# Altium PCB PCB1.PcbDoc (part 2 of 2)
Units mm, origin at the board's own origin, x right, y up, seen from the top; angles counter-clockwise.
Board outline 173.55 x 37.01 mm, 2 copper layers (Top Layer, Bottom Layer); 69 components, 61 nets, 220 pads, 230 vias.
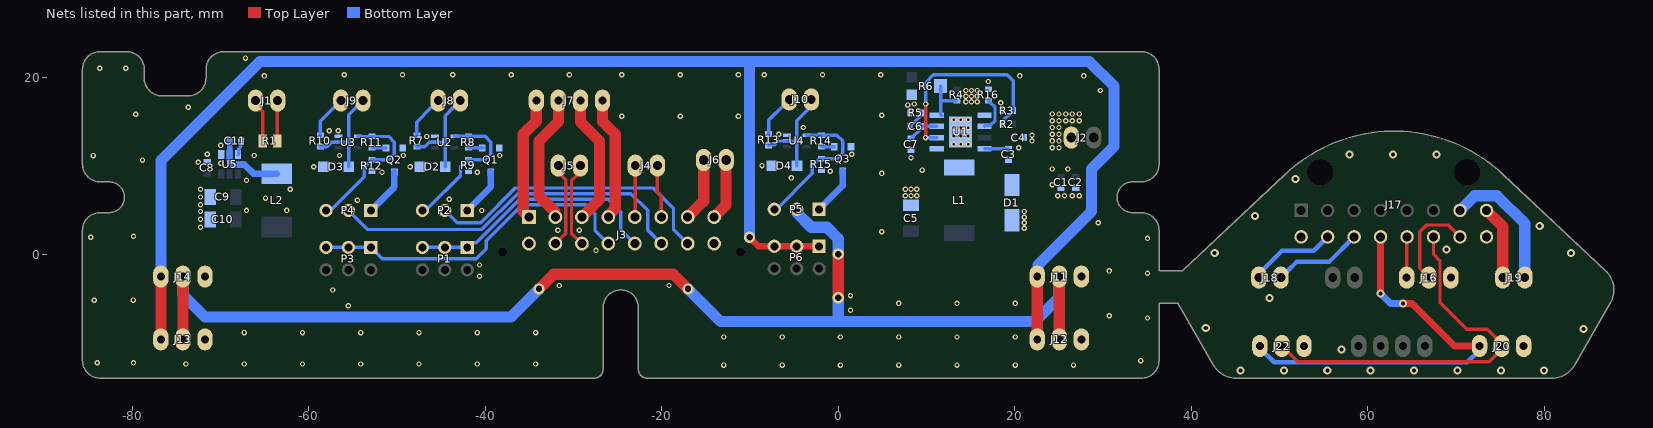
[diagram p2: the nets of this part, all layers, seen from the top]

## Via types
v1: diameter 0.61, hole 0.305, Top Layer to Bottom Layer, tented both sides, 188 vias
v2: diameter 0.914, hole 0.457, Top Layer to Bottom Layer, tented both sides, 23 vias
v3: diameter 0.305, hole 0.305, Top Layer to Bottom Layer, tented both sides, 10 vias
v4: diameter 1.27, hole 0.711, Top Layer to Bottom Layer, tented both sides, 9 vias

## Nets (pads, with @x,y where several pads share a name; then routed paths per layer and width w, separated by ;. In a path a pad name is that pad's centre, name@x,y a point inside that pad or via, vN(x,y) a via of type N, cw(c..) or ccw(c..) an arc to the next point about the centre after c; other vN are vias at no path point) (continued)
#GND: J16.3 J17.9 J17.16 J20.3 J22.3
  other v2: 45.593,-13.208 50.51,-13.208 55.426,-13.208 60.343,-13.208 65.26,-13.208 70.177,-13.208 75.093,-13.208 80.01,-13.208 57.023,-10.795 84.455,-8.509 41.656,-8.382 48.895,-4.953 42.672,0.127 83.058,0.127 68.961,0.508 79.502,3.175 47.244,4.318 51.816,8.509 57.948,11.303 62.865,11.303 67.782,11.303
"#Heater +": J17.7 J19.2 | length 15.5
  Bottom Layer w1.27: J17.7@70.468,4.953 72.119,6.604 74.676,6.604 77.811,3.469 J19.2@77.811,-2.667
"#Heater -": J17.8 J19.1 | length 8.3
  Top Layer w1.27: J17.8@73.516,4.905 75.311,3.11 J19.1@75.311,-2.667
"#signal_select B": J17.14 J20.2 J22.2 | length 43.5
  Top Layer w0.381: J22.2@50.292,-10.414 50.292,-10.419 51.117,-11.243 51.121,-11.243 52.07,-12.192 73.787,-12.192 75.184,-10.795 75.184,-10.16 73.533,-8.509 71.247,-8.509 68.199,-5.461 68.199,-0.762 67.468,-0.031 J17.14@67.468,1.953
"#signal_select C": J16.2 J17.15 | length 11.1
  Top Layer w0.381: J16.2@66.929,-2.667 66.929,-2.594 65.913,-1.578 65.913,2.54 66.675,3.302 69.119,3.302 J17.15@70.468,1.953
"#Thermistor A": J17.10 J18.1 | length 10
  Bottom Layer w0.508: J18.1@47.665,-2.667 47.665,-2.246 50.292,0.381 53.896,0.381 J17.10@55.468,1.953
"#Thermistor B": J17.11 J18.2 | length 10.2
  Bottom Layer w0.508: J18.2@50.165,-2.667 50.165,-2.662 50.99,-1.838 50.994,-1.838 51.943,-0.889 55.626,-0.889 J17.11@58.468,1.953
#VCC_select_B: J17.12 J20.1 J22.1 | length 46.9
  Top Layer w0.762: v2(61.468,-4.445) J17.12@61.468,1.953 ; v2(64.008,-5.588) 65.024,-5.588 69.85,-10.414 J20.1@72.684,-10.414
  Bottom Layer w0.508: J22.1@47.792,-10.414 47.792,-10.657 49.403,-12.268 71.304,-12.268 72.684,-10.888 J20.1@72.684,-10.414
  Bottom Layer w0.762: v2(61.468,-4.445) 62.611,-5.588 v2(64.008,-5.588)
#VCC_select_C: J16.1 J17.13 | length 4.6
  Top Layer w0.381: J16.1@64.429,-2.667 64.429,1.914 J17.13@64.468,1.953
A1: J3.1 J7.1 | length 14.1
  Top Layer w1.27: J3.1@-35.049,4.194 -35.687,4.832 -35.687,13.589 -34.21,15.066 J7.1@-34.21,17.399
A2: J3.2 J7.2 | length 14.9
  Top Layer w1.27: J3.2@-32.049,4.194 -32.106,4.251 -32.106,4.801 -33.909,6.604 -33.909,12.827 -31.71,15.026 J7.2@-31.71,17.399
B1: J3.3 J7.3 | length 14.9
  Top Layer w1.27: J7.3@-29.21,17.399 -29.21,14.986 -27.051,12.827 -27.051,6.192 J3.3@-29.049,4.194
B2: J3.4 J7.4 | length 14.1
  Top Layer w1.27: J7.4@-26.71,17.399 -26.71,15.026 -25.273,13.589 -25.273,5.139 -25.899,4.513 -25.899,4.425 -26.049,4.275 J3.4@-26.049,4.194
Endstop_X_A: J3.5 J4.1 | length 5.9
  Top Layer w0.381: J3.5@-23.049,4.194 -22.987,4.256 J4.1@-22.987,10.033
Endstop_X_B: J3.6 J4.2 | length 6
  Top Layer w0.381: J4.2@-20.487,10.033 -20.487,7.025 -20.049,6.587 J3.6@-20.049,4.194
GND: C1.1 C2.1 C4.1 C5.1 C7.1 C8.1 C9.1 C10.1 D1.2 D2.1 D3.1 D4.1 J2.2 J3.9 J3.16 J11.3 J12.3 J13.3 J14.3 Q1.2 Q2.2 Q3.2 R3.2 R5.2 R6.1 R9.1 R12.1 R15.1 R16.2 U1.5 U1.9 U2.3 U3.3 U4.3 U5.4
  other v1: -12.954,-12.573 -6.35,-12.573 0.254,-12.573 6.858,-12.573 13.462,-12.573 20.066,-12.573 26.67,-12.573 -73.914,-12.446 -67.31,-12.446 -60.706,-12.446 -54.102,-12.446 -47.498,-12.446 -40.894,-12.446 -34.29,-12.446 -83.947,-12.319 -79.857,-12.328 34.29,-12.065 -12.954,-9.398 -6.35,-9.398 0.254,-9.398 6.858,-9.398 13.462,-9.398 20.066,-9.398 -67.31,-8.89 -60.706,-8.89 -54.102,-8.89 -47.498,-8.89 -40.894,-8.89 -34.29,-8.89 35.052,-7.239 30.734,-6.985 1.397,-6.35 -55.499,-5.842 6.858,-5.588 13.462,-5.588 20.066,-5.588 -84.302,-5.216 -79.883,-5.207 1.397,-4.699 -57.277,-4.064 -31.623,-3.556 -19.177,-3.556 -40.648,-2.501 35.052,-2.159 30.734,-1.905 -40.648,-1.231 -27.44,0.42 35.052,1.778 -84.683,1.896 -79.857,2.023 4.953,2.54 -31.758,2.706 -29.345,2.706 21.082,2.921 -72.263,3.048 21.082,3.556 29.464,3.556 -72.263,3.937 21.082,4.191 -72.263,4.826 21.082,4.826 -67.056,4.953 -62.484,4.953 -40.385,4.948 -72.263,5.588 -54.482,6.091 -44.068,6.218 -64.897,6.35 -72.263,6.477 7.62,6.604 8.255,6.604 8.89,6.604 24.892,6.604 25.654,6.604 26.543,6.604 27.305,6.604 -72.263,7.366 -62.103,7.366 7.62,7.366 8.255,7.366 8.89,7.366 24.257,7.874 -67.056,8.382 -5.334,8.636 4.953,9.144 -51.689,9.271 -40.894,9.271 -0.889,9.398 9.525,9.525 24.257,9.652 26.035,9.652 -59.436,9.906 -48.514,9.906 -8.636,10.033 -69.977,10.287 -72.517,10.414 -78.841,10.659 8.255,10.922 -84.429,11.167 -66.166,11.171 -56.515,11.176 -49.276,11.176 -38.354,11.176 -71.501,11.303 1.524,11.303 20.447,12.065 24.257,12.065 25.019,12.065 -69.977,12.319 13.081,12.446 13.906,12.446 14.732,12.446 21.971,12.827 24.257,12.827 25.019,12.827 -46.609,13.335 13.081,13.377 13.906,13.377 14.732,13.377 21.971,13.462 -6.731,13.589 24.257,13.589 25.019,13.589 -57.658,13.97 -56.642,13.97 13.081,14.309 13.906,14.309 14.732,14.309 -3.937,14.351 24.257,14.351 25.019,14.351 24.257,15.113 25.019,15.113 25.781,15.113 26.543,15.113 27.305,15.113 13.081,15.24 13.906,15.24 14.732,15.24 -24.511,15.621 -17.907,15.621 -11.303,15.621 4.953,15.748 -79.603,15.866 24.257,15.875 25.019,15.875 25.781,15.875 26.543,15.875 27.305,15.875 -73.634,16.628 7.874,16.891 8.636,17.018 18.415,17.145 14.478,17.272 15.113,17.272 15.748,17.272 14.478,17.907 15.113,17.907 15.748,17.907 14.478,18.542 15.113,18.542 15.748,18.542 29.718,18.542 17.018,19.558 -65.024,20.193 20.574,20.193 27.813,20.193 -55.981,20.311 -49.377,20.311 -43.662,20.311 -37.058,20.311 -30.454,20.311 -24.511,20.32 -17.907,20.32 -11.303,20.32 -8.382,20.32 -1.778,20.32 4.826,20.32 -83.667,21.073 -80.746,21.073 -67.157,22.216
"Heater +": J3.7 J6.2 | length 7.2
  Top Layer w1.27: J3.7@-17.049,4.194 -15.24,6.003 J6.2@-15.24,10.668
"Heater -": J3.8 J6.1 | length 7
  Top Layer w1.27: J3.8@-14.049,4.194 -12.7,5.543 J6.1@-12.7,10.668
"Hotend Fan +": J8.1 R7.2 | length 4.9
  Bottom Layer w0.381: R7.2@-47.752,13.477 -47.752,14.966 -46.148,16.57 -46.144,16.57 -45.319,17.394 J8.1@-45.319,17.399
"Hotend Fan -": D2.2 J8.2 R7.1 U2.2 | length 11.6
  Bottom Layer w0.381: R7.1@-47.752,12.177 -47.751,12.178 -46.877,12.178 -46.364,12.691 -45.686,12.691 U2.2@-45.677,12.7 -45.667,12.691 -45.287,12.691 -45.263,12.667 -44.544,12.667 ; D2.2@-44.544,9.906 -44.544,12.667 ; J8.2@-42.819,17.399 -42.819,17.394 -43.644,16.57 -43.648,16.57 -44.544,15.674 -44.544,12.667
NetC3_1: C3.1 D1.1 L1.1 U1.1
NetC3_2: C3.2 U1.8 | length 2.7
  Bottom Layer w0.381: U1.8@16.576,11.938 C3.2@19.289,11.938
NetC6_1: C6.1 R5.1 | length 2.1
  Bottom Layer w0.381: C6.1@8.113,14.478 8.113,14.553 8.247,14.688 8.323,14.688 9.279,15.644 9.279,15.867 R5.1@9.413,16.002
NetC6_2: C6.2 C7.2 U1.3 | length 3.7
  Bottom Layer w0.381: C7.2@8.255,13.096 8.33,13.096 8.465,13.231 8.465,13.306 9.279,14.12 9.279,14.343 C6.2@9.413,14.478 U1.3@11.176,14.478
NetC11_1: C11.1 U5.6 | length 1.7
  Bottom Layer w0.381: U5.6@-68.011,11.275 -67.945,11.341 -67.945,11.938 -67.691,12.192 -67.691,12.812 C11.1@-67.676,12.827
NetC11_2: C11.2 L2.1 U5.5 | length 8.2
  Bottom Layer w0.635: U5.5@-68.961,10.795 U5.5@-68.961,11.275 C11.2@-68.961,12.812
  Bottom Layer w0.762: U5.5@-68.961,10.795 -68.961,10.606 -68.515,10.16 -67.31,10.16 -66.271,9.121 L2.1@-63.627,9.121
NetJ1_1: J1.1 R1.2 | length 4.9
  Top Layer w0.381: J1.1@-66.02,17.399 -66.02,16.922 -65.214,16.116 R1.2@-65.214,12.827
NetJ1_2: J1.2 R1.1 | length 4.6
  Top Layer w0.381: R1.1@-63.564,12.827 -63.564,17.355 J1.2@-63.52,17.399
NetP2_1: P2.1 Q1.3 | length 5.4
  Bottom Layer w0.762: P2.1@-42.037,4.953 -39.37,7.62 Q1.3@-39.37,9.298
NetP4_1: P4.1 Q2.3 | length 5.4
  Bottom Layer w0.762: P4.1@-52.959,4.953 -50.292,7.62 Q2.3@-50.292,9.298
NetP5_1: P5.1 Q3.3 | length 5.4
  Bottom Layer w0.762: P5.1@-2.159,5.08 0.508,7.747 Q3.3@0.508,9.425
NetQ1_1: Q1.1 R8.1 | length 1.6
  Bottom Layer w0.381: R8.1@-41.91,12.05 Q1.1@-40.342,12.05 ; Q1.1@-40.215,12.05 Q1.1@-40.203,12.038
NetQ2_1: Q2.1 R11.1 | length 1.6
  Bottom Layer w0.381: R11.1@-52.832,12.05 -51.264,12.05 Q2.1@-51.252,12.038
NetQ3_1: Q3.1 R14.1 | length 1.5
  Bottom Layer w0.381: R14.1@-1.905,12.192 R14.1@-1.905,12.177 -0.464,12.177 Q3.1@-0.452,12.165
NetR2_2: R2.2 R3.1 U1.2 | length 23.6
  Top Layer w0.381: v1(9.906,13.208) v1(9.906,17.018)
  Bottom Layer w0.381: v1(9.906,13.208) U1.2@11.176,13.208 ; v1(9.906,17.018) 9.906,19.431 10.795,20.32 19.177,20.32 19.827,19.67 R3.1@19.827,16.256 19.827,16.181 19.693,16.046 19.617,16.046 18.661,15.09 18.661,14.867 R2.2@18.527,14.732
NetR4_1: R4.1 R6.2 U1.4 | length 5.3
  Bottom Layer w0.381: R6.2@11.608,19.05 11.608,17.427 ; U1.4@11.723,15.689 11.608,15.804 11.608,17.427 ; R4.1@13.462,17.384 11.651,17.384 11.608,17.427
NetR16_1: R16.1 U1.6 | length 4.1
  Bottom Layer w0.381: U1.6@16.576,14.478 16.691,14.593 17.26,14.593 17.78,15.113 17.78,16.622 17.228,17.174 17.228,17.249 17.093,17.384 R16.1@17.018,17.384
"Part Cooling Fan +": J9.1 R10.2 | length 4.9
  Bottom Layer w0.381: R10.2@-58.674,13.477 -58.674,15.073 -57.177,16.57 -57.173,16.57 -56.348,17.394 J9.1@-56.348,17.399
"Part Cooling Fan -": D3.2 J9.2 R10.1 U3.2 | length 11.6
  Bottom Layer w0.381: R10.1@-58.674,12.177 -58.673,12.178 -57.926,12.178 -57.419,12.685 U3.2@-56.642,12.685 -56.632,12.676 -55.466,12.676 ; D3.2@-55.466,9.906 -55.466,12.676 ; J9.2@-53.848,17.399 -53.848,17.394 -54.673,16.57 -54.677,16.57 -55.466,15.781 -55.466,12.676
"PWM A": P5.3 R14.2 R15.2 U4.4 | length 16.6
  Bottom Layer w0.381: P5.3@-7.239,5.08 -6.985,5.08 -2.921,9.144 -2.921,9.996 -2.242,10.675 -2.107,10.81 -0.112,10.81 0.508,11.43 0.508,12.827 -0.142,13.477 -2.032,13.477 U4.4@-3.599,13.477
"PWM B": P4.3 R11.2 R12.2 U3.4 | length 16.8
  Bottom Layer w0.381: P4.3@-58.039,4.953 -57.825,5.167 -57.317,5.167 -53.721,8.763 -53.721,9.869 -53.042,10.548 -52.907,10.683 -50.912,10.683 -50.292,11.303 -50.292,12.7 -50.927,13.335 -52.817,13.335 R11.2@-52.832,13.35 -52.847,13.335 U3.4@-54.442,13.335
"PWM C": P2.3 R8.2 R9.2 U2.4 | length 16.7
  Bottom Layer w0.381: P2.3@-47.117,4.953 -46.814,4.953 -46.451,5.316 -46.373,5.316 -42.799,8.89 -42.799,9.884 -42.12,10.563 -41.985,10.698 -39.975,10.698 -39.37,11.303 -39.37,12.7 -40.02,13.35 R8.2@-41.91,13.35 U2.4@-43.477,13.35
"side Part Cooling Fan +": J10.1 R13.2 | length 4.9
  Bottom Layer w0.381: R13.2@-7.874,13.604 -7.874,15.2 -6.185,16.889 -6.18,16.889 -5.548,17.521 J10.1@-5.548,17.526
"side Part Cooling Fan -": D4.2 J10.2 R13.1 U4.2 | length 11.6
  Bottom Layer w0.381: R13.1@-7.874,12.304 -7.798,12.38 -7.178,12.38 -6.731,12.827 U4.2@-5.799,12.827 -5.789,12.818 -4.699,12.818 ; D4.2@-4.666,10.033 -4.699,10.066 -4.699,12.818 ; J10.2@-3.048,17.526 -3.048,16.781 -3.496,16.332 -3.496,16.316 -4.699,15.113 -4.699,12.818
"signal_select A": J11.2 J12.2 J13.2 J14.2 P5.2 | length 140.1
  Top Layer w1.27: J13.2@-74.255,-9.652 J14.2@-74.255,-2.54 ; v4(-33.909,-3.937) -32.258,-2.286 -18.669,-2.286 v4(-17.018,-3.937) ; v4(0,-4.953) v4(0,0) ; J12.2@25.059,-9.652 J11.2@25.059,-2.54
  Bottom Layer w1.27: J14.2@-74.255,-2.54 -74.255,-4.612 -71.755,-7.112 -37.084,-7.112 v4(-33.909,-3.937) ; v4(-17.018,-3.937) -13.335,-7.62 0,-7.62 ; P5.2@-4.699,5.08 -4.655,5.036 -4.655,4.655 -3.048,3.048 -1.27,3.048 0,1.778 v4(0,0) ; v4(0,-4.953) 0,-7.62 ; J12.2@24.967,-9.744 J12.2@25.059,-9.652 ; J11.2@25.059,-2.54 25.059,-4.881 22.32,-7.62 0,-7.62
"signal_select B": J3.14 P4.2 | length 41.7
  Bottom Layer w0.381: P4.2@-55.499,4.953 -53.34,2.794 -40.386,2.794 -36.322,6.858 -23.495,6.858 -21.59,4.953 -21.59,2.735 J3.14@-20.049,1.194
"signal_select C": J3.15 P2.2 | length 33.7
  Bottom Layer w0.381: P2.2@-44.577,4.953 -43.18,3.556 -40.513,3.556 -36.576,7.493 -20.955,7.493 -18.669,5.207 -18.669,2.814 J3.15@-17.049,1.194
"Thermistor A": J3.10 J5.1 | length 9.3
  Top Layer w0.381: J3.10@-32.049,1.194 -30.861,2.382 -30.861,8.416 -31.73,9.285 J5.1@-31.73,9.652
"Thermistor B": J3.11 J5.2 | length 9.4
  Top Layer w0.381: J5.2@-29.23,9.652 -29.23,9.285 -30.226,8.289 -30.226,2.371 J3.11@-29.049,1.194
VCC_select_A: J11.1 J12.1 J13.1 J14.1 P6.1 P6.3 P6.5 | length 194.7
  Top Layer w0.762: v4(-10.033,1.905) -9.017,0.889 P6.5@-7.239,0.889 P6.3@-4.699,0.889 P6.1@-2.159,0.889
  Top Layer w1.27: J13.1@-76.755,-9.652 J14.1@-76.755,-2.54 ; J12.1@22.559,-9.652 J11.1@22.559,-2.54 J11.1@22.64,-2.459
  Bottom Layer w1.27: J14.1@-76.755,-2.54 -76.755,10.621 -65.532,21.844 -10.033,21.844 ; v4(-10.033,1.905) -10.033,21.844 ; J11.1@22.559,-2.54 22.651,-2.448 22.651,-1.225 28.702,4.826 28.702,9.652 31.242,12.192 31.242,19.05 28.448,21.844 -10.033,21.844
VCC_select_B: J3.12 P3.1 P3.3 P3.5 | length 38.5
  Bottom Layer w0.381: P3.5@-58.039,0.762 P3.3@-55.499,0.762 P3.1@-52.959,0.762 -51.689,-0.508 -41.021,-0.508 -39.878,0.635 -39.878,1.524 -35.814,5.588 -28.575,5.588 -27.559,4.572 -27.559,2.704 J3.12@-26.049,1.194
VCC_select_C: J3.13 P1.1 P1.3 P1.5 | length 29.6
  Bottom Layer w0.381: P1.5@-47.117,0.762 P1.3@-44.577,0.762 P1.1@-42.037,0.762 -41.518,1.281 -41.01,1.281 -36.068,6.223 -26.035,6.223 -24.638,4.826 -24.638,2.783 J3.13@-23.049,1.194
pads on no net: J3. J17.17 J17.18 R6.3 U2.1 U3.1 U4.1
copper on no net:
  other v3: 37.846,-5.08 36.703,-4.826 37.719,-4.445 36.703,-4.191 36.703,-3.556 37.719,-3.556 36.703,-2.921 37.846,-2.921 36.703,-2.286 38.227,-2.286

## Polygon pours and split planes (outlines as drawn)
GND on Bottom Layer "NONET_L-01_P-001" (solid, remove dead copper, pour order 13): -85.638,-12.055 -85.638,2.695 cw(c-83.638,2.695) -83.638,4.695 -82.638,4.695 ccw(c-82.638,6.445) -82.638,8.195 -83.638,8.195 cw(c-83.638,10.195) -85.638,10.195 -85.638,20.945 cw(c-83.638,20.945) -83.638,22.945 -80.638,22.945 cw(c-80.638,20.945) -78.638,20.945 -78.638,19.945 ccw(c-76.638,19.945) -76.638,17.945 -73.638,17.945 ccw(c-73.638,19.945) -71.638,19.945 -71.638,20.945 cw(c-69.638,20.945) -69.638,22.945 34.362,22.945 cw(c34.362,20.945) 36.362,20.945 36.362,10.195 cw(c34.362,10.195) 34.362,8.195 33.362,8.195 ccw(c33.362,6.445) 33.362,4.695 34.362,4.695 cw(c34.362,2.695) 36.362,2.695 36.362,-12.055 cw(c34.362,-12.055) 34.362,-14.055 -21.638,-14.055 cw(c-21.638,-13.055) -22.638,-13.055 -22.638,-6.055 ccw(c-24.638,-6.055) -26.638,-6.055 -26.638,-13.055 cw(c-27.638,-13.055) -27.638,-14.055 -83.638,-14.055 cw(c-83.638,-12.055)
#GND on Bottom Layer "NONET_L-01_P-001" (solid, remove dead copper, pour order 15): 42.515,-12.564 ccw(c45.113,-11.064) 45.113,-14.064 80.871,-14.064 ccw(c80.871,-11.064) 83.469,-12.564 87.51,-5.564 ccw(c84.912,-4.064) 86.965,-1.876 75.31,9.061 ccw(c62.992,-4.064) 50.674,9.061 39.019,-1.876 ccw(c41.072,-4.064) 38.474,-5.564
NetC3_1 on Bottom Layer "NONET_L-01_P-001" (solid, pour order 12): 19.685,11.049 20.574,10.16 20.574,6.604 11.176,6.604 10.16,7.62 10.16,12.319 12.065,12.319 12.065,11.176 12.192,11.049
12V on Bottom Layer "NONET_L-01_P-001" (solid, pour order 8): 7.366,3.302 15.494,3.302 15.494,1.397 7.366,1.397
#GND on Top Layer "NONET_L-01_P-001" (solid, remove dead copper, pour order 14): 42.515,-12.564 ccw(c45.113,-11.064) 45.113,-14.064 80.871,-14.064 ccw(c80.871,-11.064) 83.469,-12.564 87.51,-5.564 ccw(c84.912,-4.064) 86.965,-1.876 75.31,9.061 ccw(c62.992,-4.064) 50.674,9.061 39.019,-1.876 ccw(c41.072,-4.064) 38.474,-5.564
GND on Top Layer "NONET_L-01_P-001" (solid, remove dead copper, pour order 6): -85.638,-12.055 -85.638,2.695 cw(c-83.638,2.695) -83.638,4.695 -82.638,4.695 ccw(c-82.638,6.445) -82.638,8.195 -83.638,8.195 cw(c-83.638,10.195) -85.638,10.195 -85.638,20.945 cw(c-83.638,20.945) -83.638,22.945 -80.638,22.945 cw(c-80.638,20.945) -78.638,20.945 -78.638,19.945 ccw(c-76.638,19.945) -76.638,17.945 -73.638,17.945 ccw(c-73.638,19.945) -71.638,19.945 -71.638,20.945 cw(c-69.638,20.945) -69.638,22.945 34.362,22.945 cw(c34.362,20.945) 36.362,20.945 36.362,10.195 cw(c34.362,10.195) 34.362,8.195 33.362,8.195 ccw(c33.362,6.445) 33.362,4.695 34.362,4.695 cw(c34.362,2.695) 36.362,2.695 36.362,-12.055 cw(c34.362,-12.055) 34.362,-14.055 -21.638,-14.055 cw(c-21.638,-13.055) -22.638,-13.055 -22.638,-6.055 ccw(c-24.638,-6.055) -26.638,-6.055 -26.638,-13.055 cw(c-27.638,-13.055) -27.638,-14.055 -83.638,-14.055 cw(c-83.638,-12.055)

## Keep-outs
Keep-Out Layer:
  circle w0.5: c41.072,-4.064 r1.7
  circle w0.5: c84.912,-4.064 r1.7
  lines w0.254: 38.474,-5.564 42.515,-12.564 ccw(c45.113,-11.064) 45.113,-14.064 80.871,-14.064 ccw(c80.871,-11.064) 83.469,-12.564 87.51,-5.564 ccw(c84.912,-4.064) 86.965,-1.876 75.31,9.061 ccw(c62.992,-4.064) 50.674,9.061 39.019,-1.876 36.362,-1.876 36.362,2.695 ccw(c34.362,2.695) 34.362,4.695 33.362,4.695 cw(c33.362,6.445) 33.362,8.195 34.362,8.195 ccw(c34.362,10.195) 36.362,10.195 36.362,20.945 ccw(c34.362,20.945) 34.362,22.945 -69.638,22.945 ccw(c-69.638,20.945) -71.638,20.945 -71.638,19.945 cw(c-73.638,19.945) -73.638,17.945 -76.638,17.945 cw(c-76.638,19.945) -78.638,19.945 -78.638,20.945 ccw(c-80.638,20.945) -80.638,22.945 -83.638,22.945 ccw(c-83.638,20.945) -85.638,20.945 -85.638,10.195 ccw(c-83.638,10.195) -83.638,8.195 -82.638,8.195 cw(c-82.638,6.445) -82.638,4.695 -83.638,4.695 ccw(c-83.638,2.695) -85.638,2.695 -85.638,-12.055 ccw(c-83.638,-12.055) -83.638,-14.055 -27.638,-14.055 ccw(c-27.638,-13.055) -26.638,-13.055 -26.638,-6.055 cw(c-24.638,-6.055) -22.638,-6.055 -22.638,-13.055 ccw(c-21.638,-13.055) -21.638,-14.055 34.362,-14.055 ccw(c34.362,-12.055) 36.362,-12.055 36.362,-5.588 38.481,-5.588
  lines w1: -30.638,-11.555 ccw(c-29.638,-11.555) -28.638,-11.555 -28.638,-8.555 ccw(c-29.638,-8.555) -30.638,-8.555 -30.638,-11.555 ; -20.638,-11.555 ccw(c-19.638,-11.555) -18.638,-11.555 -18.638,-8.555 ccw(c-19.638,-8.555) -20.638,-8.555 -20.638,-11.555

## Other copper
Top Layer:
  pour cut-out: 81.412,-4.064 ccw(c84.912,-4.064) 84.912,-7.564 ccw(c84.912,-4.064) 88.412,-4.064 ccw(c84.912,-4.064) 84.912,-0.564 ccw(c84.912,-4.064)
  pour cut-out: 37.572,-4.064 ccw(c41.072,-4.064) 41.072,-7.564 ccw(c41.072,-4.064) 44.572,-4.064 ccw(c41.072,-4.064) 41.072,-0.564 ccw(c41.072,-4.064)
  pour cut-out: 70.468,1.953 67.468,1.953 67.468,2.509 67.564,2.413 70.485,2.413
  pour cut-out: 55.585,5.84 61.585,5.84 61.468,5.723 61.468,4.953 55.468,4.953
  pour cut-out: 66.294,-10.932 73.202,-10.932 72.303,-10.033 69.215,-10.033
  pour cut-out: 58.726,-11.765 58.761,-11.8 61.488,-11.8 61.488,-10.341 61.415,-10.414 58.988,-10.414
  pour cut-out: 61.352,-5.029 61.403,-5.08 62.865,-5.08 62.865,-3.683
  pour cut-out: 66.079,2.84 62.911,2.84 62.738,2.667 62.738,0.889 63.404,0.889
  pour cut-out: 53.355,5.84 55.585,5.84 55.468,5.723 55.468,4.953 52.468,4.953
  pour cut-out: -31.71,18.785 -29.21,18.785 -29.21,17.399 -31.71,17.399
Bottom Layer:
  pour cut-out: 58.988,-9.028 66.488,-9.028 66.488,-10.414 58.988,-10.414
  pour cut-out: 56.047,-4.053 58.547,-4.053 58.547,-2.667 56.047,-2.667
  pour cut-out: -44.039,5.655 -44.136,5.655 -45.085,6.604 -46.736,4.953 -44.577,4.953
  pour cut-out: -54.961,5.655 -54.961,5.685 -55.88,6.604 -57.15,5.334
  pour cut-out: -82.638,2.445 cw(c-82.638,6.445) -86.638,6.445 cw(c-82.638,6.445) -82.638,10.445 cw(c-82.638,6.445) -78.638,6.445 cw(c-82.638,6.445)
  pour cut-out: 29.362,6.445 ccw(c33.362,6.445) 33.362,2.445 ccw(c33.362,6.445) 37.362,6.445 ccw(c33.362,6.445) 33.362,10.445 ccw(c33.362,6.445)
  pour cut-out: -16.929,0.282 -26.169,0.282 -26.169,1.277 -27.178,2.286 -27.051,2.413 -17.907,2.413 -16.891,1.397
  pour cut-out: 12.103,13.64 10.995,12.532 10.023,12.532 10.023,10.297 10.033,10.287 8.636,10.287 9.271,10.922 9.271,12.192 9.234,12.192 8.782,12.644 7.728,12.644 7.728,13.884 7.661,13.951 7.661,15.005 12.008,15.005 12.103,14.91
  pour cut-out: 13.989,18.232 13.989,17.836 12.935,17.836 12.935,18.232
  pour cut-out: 20.279,15.729 20.279,15.408 20.32,15.367 20.29,15.337 19.546,15.337 19.546,15.633 19.431,15.748
  pour cut-out: 19.831,11.682 19.831,11.097 15.7,11.097 15.621,11.176 15.649,11.204 15.649,11.687
  pour cut-out: 12.103,12.83 12.103,12.418 12.202,12.319 10.023,12.319 10.023,12.746 9.938,12.83
  pour cut-out: 12.103,15.316 12.103,14.91 10.249,14.91 10.249,15.316
  pour cut-out: 15.649,14.046 15.649,13.64 16.727,13.64 16.727,14.06 16.764,14.097
  pour cut-out: -4.572,13.716 -4.484,13.804 -4.176,13.804 -4.176,13.15 -4.372,12.954 -4.826,12.954
  pour cut-out: -44.323,13.716 -44.284,13.677 -44.054,13.677 -44.054,13.023 -44.123,12.954 -44.323,12.954

## Silkscreen, mask and mechanical layers (free items; w line width, h text height)
Top Overlay:
  lines w0.203: -55.499,6.223 -55.499,7.874 ; -44.577,6.223 -44.577,7.874 ; -4.699,6.35 -4.699,8.001
  lines w0.254: 39.593,-7.236 ccw(c41.072,-4.064) 40.464,-0.617 ; 85.52,-0.617 ccw(c84.912,-4.064) 86.391,-7.236
  text "Chamber" at -67.437,20.574 h1.52
  text "Auxiliary object Cooling Fan" at -9.906,19.241 h1.02
  text "Part Fan" at -57.658,19.193 h1.52
  text "HE Fan" at -45.847,19.19 h1.27
  text "Thermistor" at -67.945,19.177 h1.52
  text "Motor" at -32.131,19.066 h1.52
  text "-" at -3.272,15.033 h2.03
  text "+" at -5.812,15.012 h1.52
  text "-" at -54.199,14.906 h2.03
  text "-" at -43.15,14.906 h2.03
  text "+" at -56.739,14.885 h1.52
  text "+" at -45.69,14.885 h1.52
  text "A1" at -34.925,14.605 h1.52
  text "A2" at -32.512,14.605 h1.52
  text "B1" at -29.845,14.605 h1.52
  text "B2" at -27.432,14.605 h1.52
  text "HE" at -14.732,12.446 h1.27
  text "Therm" at -32.004,11.824 h1.27
  text "Endstop" at -23.622,11.782 h1.27
  text "Input 24V" at 33.511,11.557 h1.52 r90
  text "POWER" at 31.987,11.43 h1.52 r90
  text "-" at 26.162,10.785 h2.03
  text "+" at 28.575,10.764 h1.52
  text "3 wire" at -8.636,6.875 h1.52
  text "2 wire" at -4.319,6.874 h1.52
  text "3 wire" at -59.436,6.748 h1.52
  text "2 wire" at -55.119,6.747 h1.52
  text "3 wire" at -48.514,6.748 h1.52
  text "2 wire" at -44.197,6.747 h1.52
  text "Auxiliary object Cooling Fan" at -8.636,2.731 h1.02
  text "Part Cooling Fan" at -59.309,2.604 h1.02
  text "Hotend Cooling Fan" at -48.387,2.604 h1.02
  text "Endstop" at 53.594,0.352 h1.27
  text "Therm" at 45.085,0.267 h1.27
  text "+Vs" at 63.246,0.143 h1.52
  text "-S" at 66.421,0.144 h1.52
  text "G" at 68.961,0.144 h1.52
  text "HE" at 72.898,0.127 h1.27
  text "+Vs" at 21.426,-0.814 h1.52
  text "G" at 27.141,-0.813 h1.52
  text "-S" at 24.511,-0.872 h1.52
  text "+Vs" at -77.888,-0.941 h1.52
  text "G" at -72.173,-0.94 h1.52
  text "-S" at -74.803,-0.999 h1.52
  text "12V" at -56.388,-4.064 h1.52 r315
  text "24V" at -53.722,-4.063 h1.52 r315
  text "12V" at -45.212,-4.064 h1.52 r315
  text "24V" at -42.546,-4.063 h1.52 r315
  text "12V" at -5.588,-4.064 h1.52 r315
  text "24V" at -2.922,-4.063 h1.52 r315
  text "5V" at -58.916,-4.179 h1.52 r315
  text "5V" at -47.74,-4.179 h1.52 r315
  text "5V" at -8.116,-4.179 h1.52 r315
  text "HE Fan" at 61.087,-7.353 h1.27
  text "+Vs" at 46.609,-7.477 h1.52
  text "-S" at 49.784,-7.476 h1.52
  text "G" at 52.324,-7.476 h1.52
  text "+Vs" at 71.628,-7.477 h1.52
  text "-S" at 74.676,-7.476 h1.52
  text "G" at 77.216,-7.476 h1.52
  text "+Vs" at 21.426,-7.926 h1.52
  text "G" at 27.141,-7.925 h1.52
  text "-S" at 24.511,-7.984 h1.52
  text "Part Fan" at 80.788,-8.001 h1.52 r270
  text "+Vs" at -77.888,-8.053 h1.52
  text "G" at -72.173,-8.052 h1.52
  text "-S" at -74.803,-8.111 h1.52
  text "Part Fan" at 44.688,-13.081 h1.52 r90
Bottom Overlay:
  pour cut-out: -34.163,5.08 -34.163,5.334 -34.671,5.334 -34.798,5.207 -34.798,5.08
  lines w0.254: -85.417,3.568 ccw(c-82.638,6.445) -85.417,9.322 ; 36.141,3.568 cw(c33.362,6.445) 36.141,9.322
  text "-" at 26.162,17.262 h2.03
  text "+" at 28.575,17.241 h1.52
  text "Part Fan" at -50.911,14.986 h1.52 r270
  text "HE Fan" at -39.865,14.986 h1.27 r270
  text "Endstop" at -23.622,6.887 h1.27 r180
  text "HE" at -14.605,6.858 h1.27 r180
  text "Therm" at -32.131,6.845 h1.27 r180
  text "+Vs" at -77.978,2.27 h1.52 r180
  text "-S" at -74.93,2.269 h1.52 r180
  text "G" at -72.136,2.269 h1.52 r180
  text "+Vs" at 21.463,2.27 h1.52 r180
  text "-S" at 24.511,2.269 h1.52 r180
  text "G" at 27.178,2.269 h1.52 r180
  text "Auxiliary object Cooling Fan OUTPUT" at 32.004,2.159 h1.02 r90
  text "2 Wire fan connect +Vs and -S" at 71.883,-6.714 h1.52
  text "3 Wire fan connect +Vs -S and Gnd" at 73.406,-8.492 h1.52
  text "2 Wire fan connect +Vs and -S" at -2.414,-9.796 h1.52 r180
  text "Dec_xlll Design" at -58.293,-9.819 h1.52 r180
  text "V0 Umbilical breakout board" at -58.293,-11.084 h1.52 r180
  text "3 Wire fan connect +Vs -S and Gnd" at -3.175,-11.066 h1.52 r180
  text "+Vs" at -78.105,-12.716 h1.52 r180
  text "-S" at -74.93,-12.717 h1.52 r180
  text "G" at -72.263,-12.717 h1.52 r180
  text "+Vs" at 21.336,-12.716 h1.52 r180
  text "-S" at 24.511,-12.717 h1.52 r180
  text "G" at 27.178,-12.717 h1.52 r180
  text "Auxiliary object Cooling Fan OUTPUT" at -81.28,-13.208 h1.02 r270